# Altium PCB DIOT_Template.PcbDoc (part 1 of 4)
Units mm, origin at the board's own origin, x right, y up, seen from the top; angles counter-clockwise.
Board outline 222.9 x 100 mm, 4 copper layers (L1, P2, P3, L4), stack 1.546 mm thick; 233 components, 184 nets, 1067 pads, 325 vias.
Unrouted connection lines stored in the file: 423.
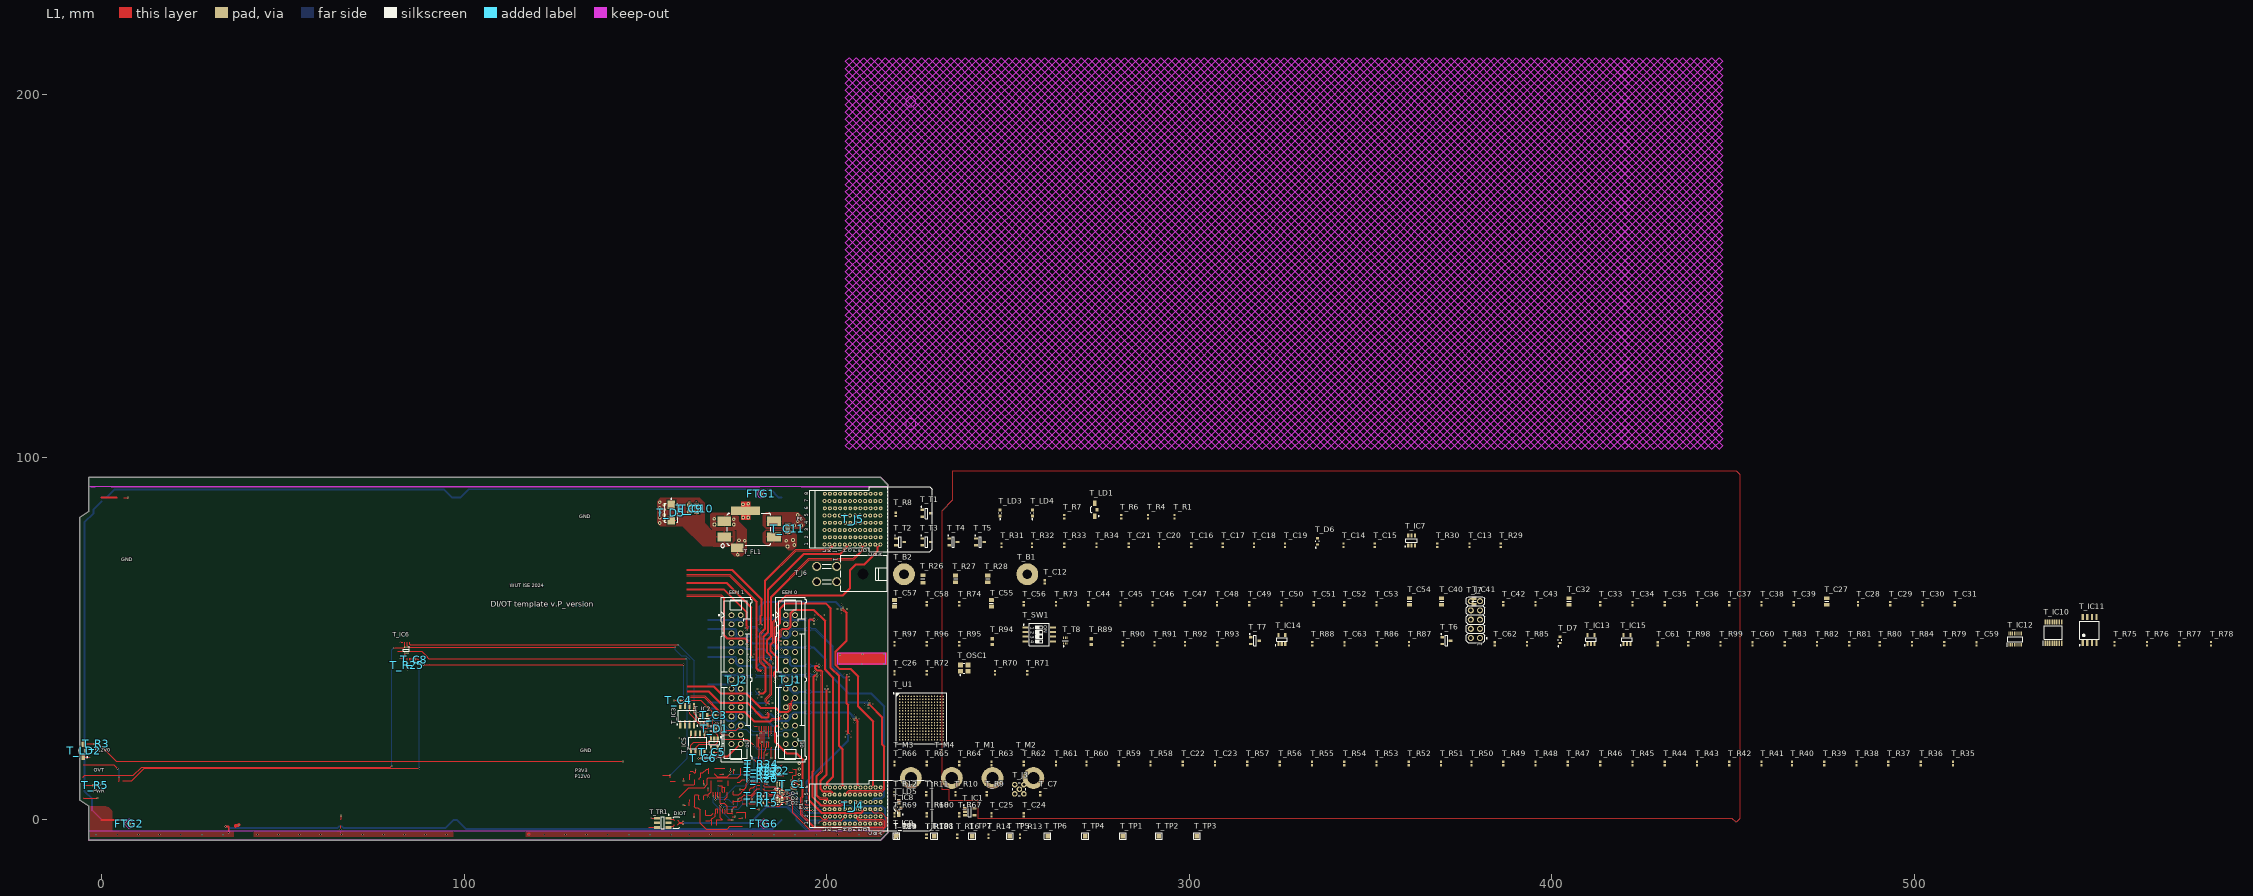
[diagram p0: L1 view]
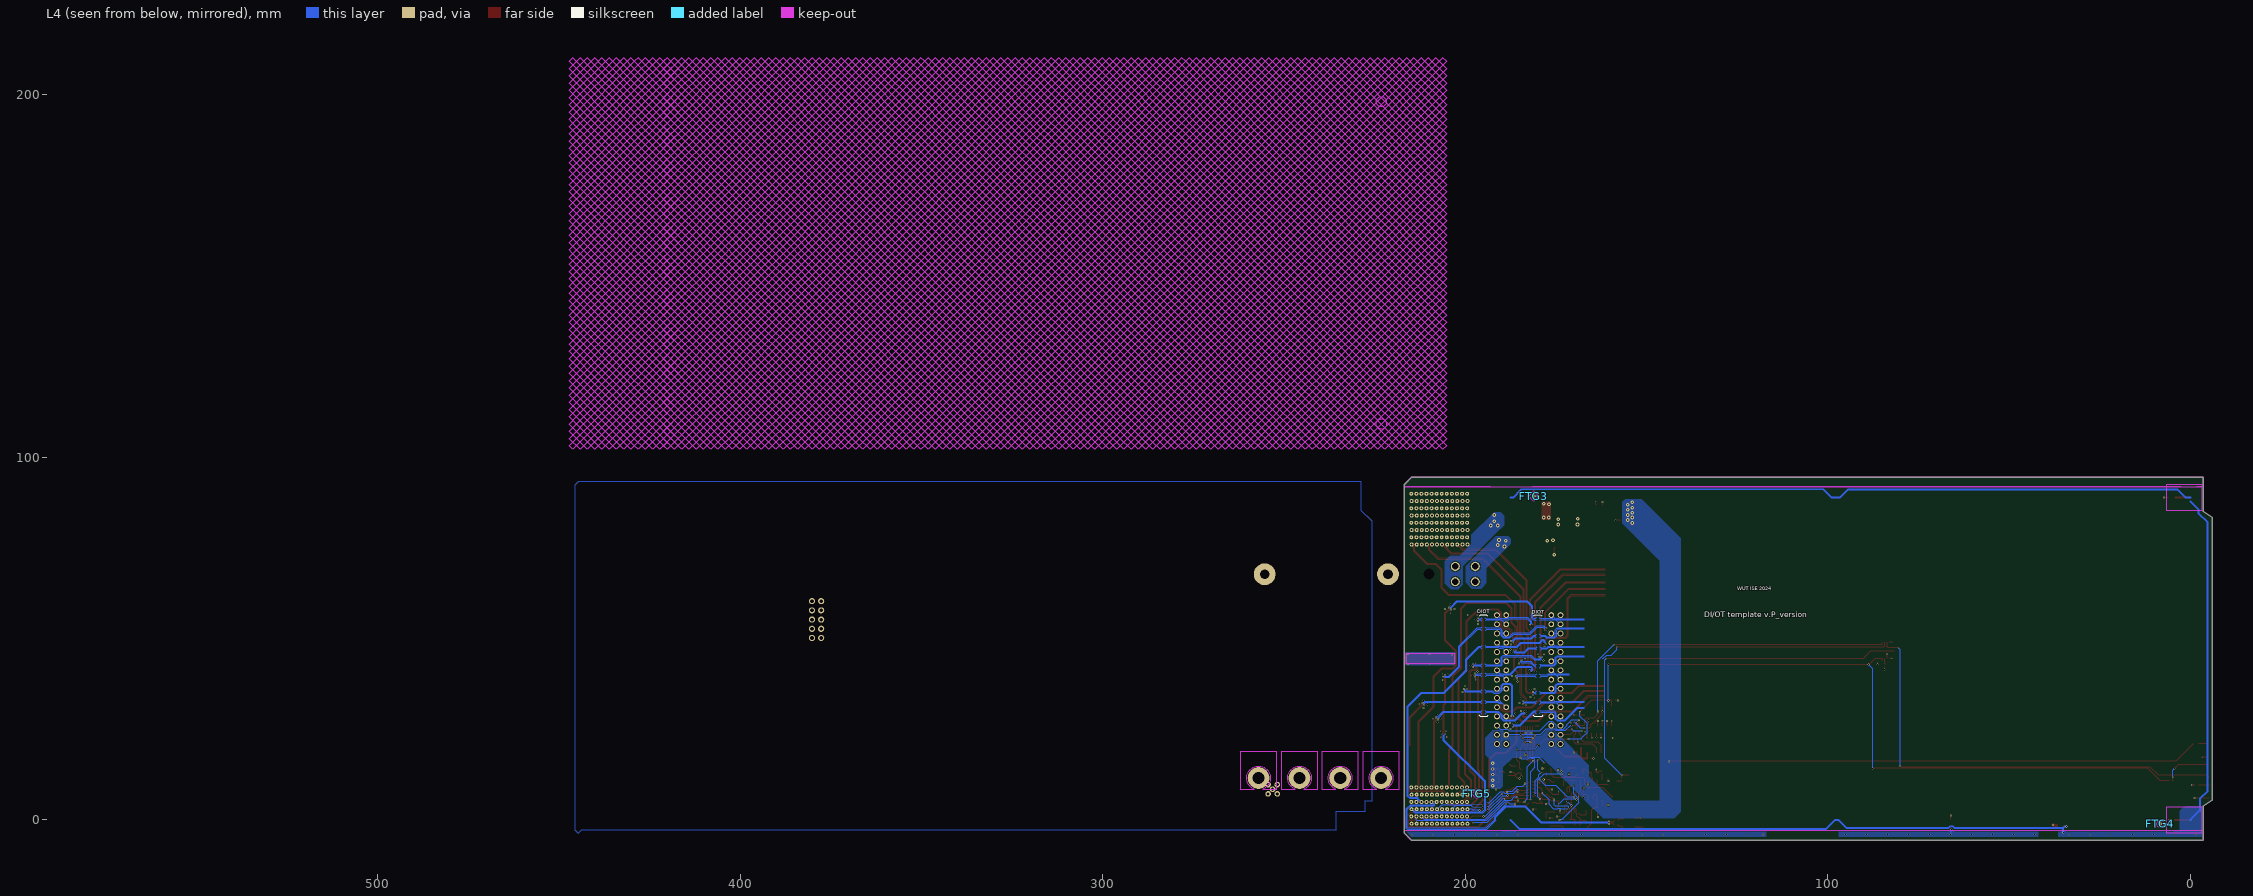
[diagram p1: L4 view, seen from below]
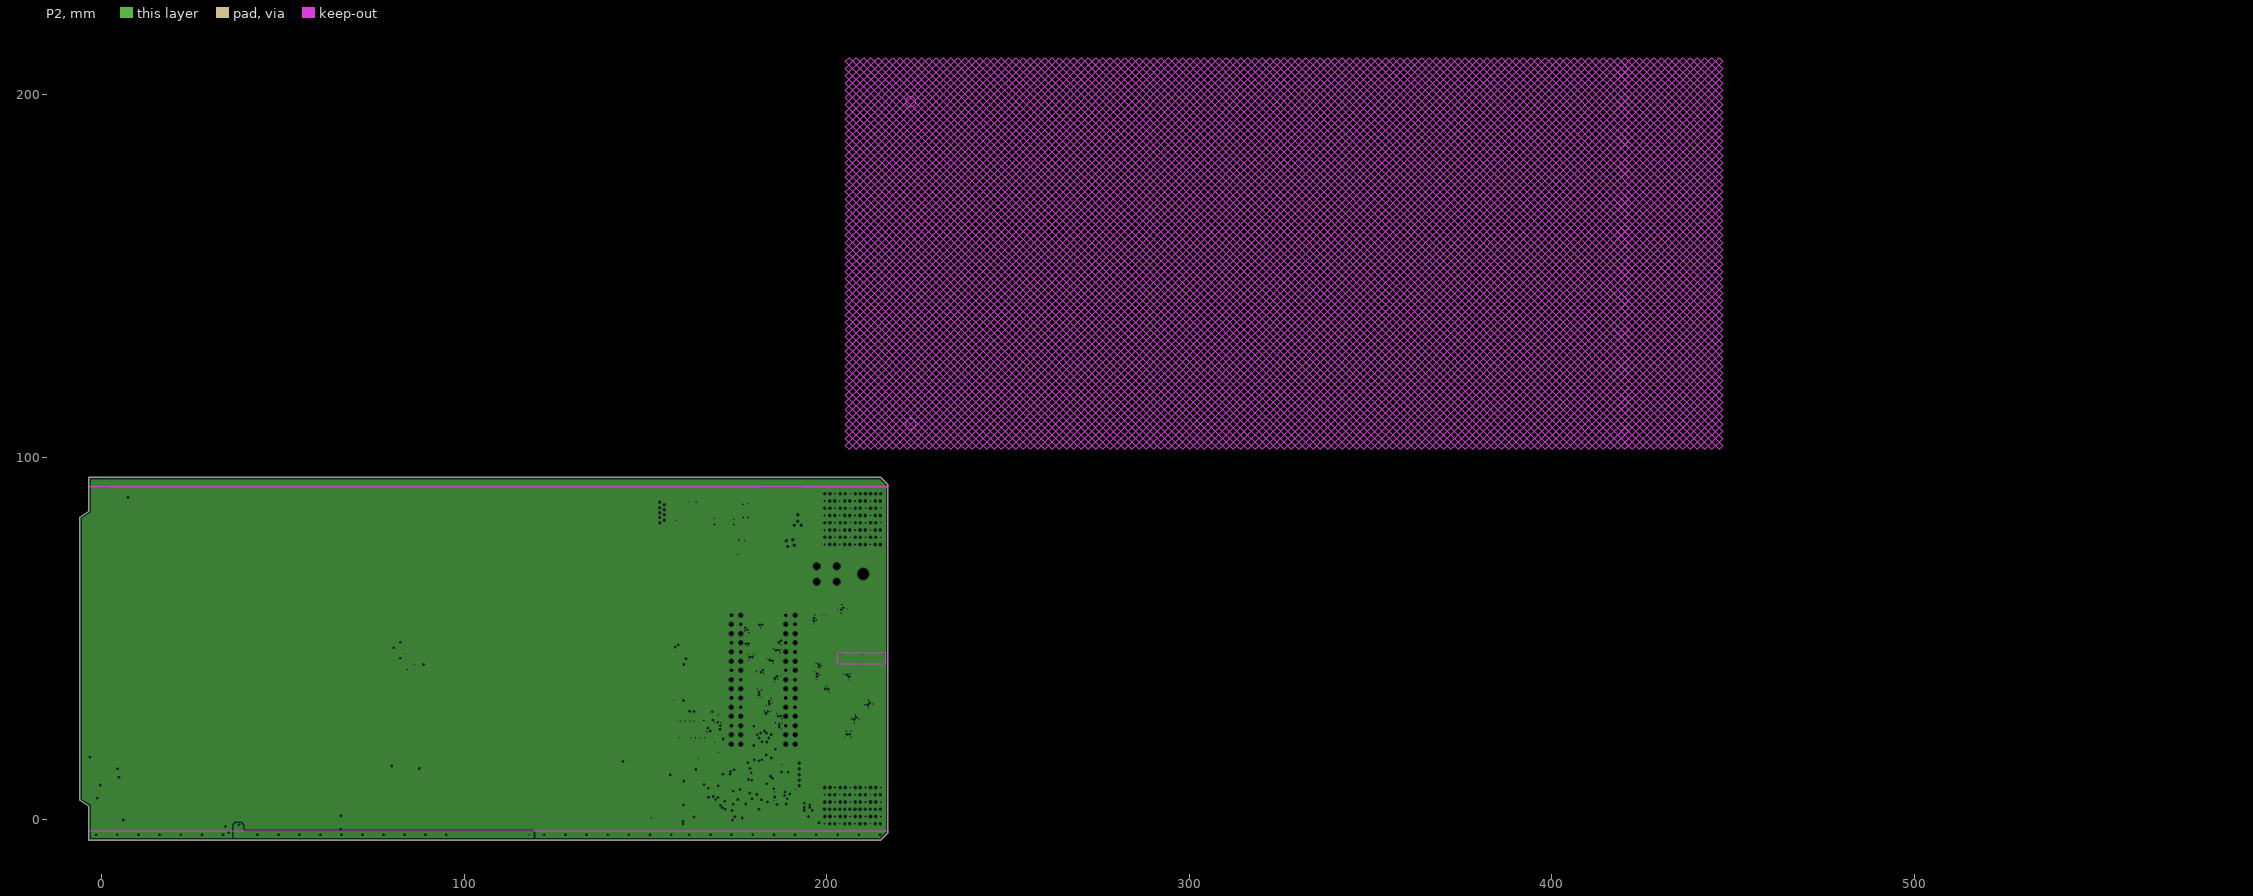
[diagram p2: P2, clearances drawn from the general rule]
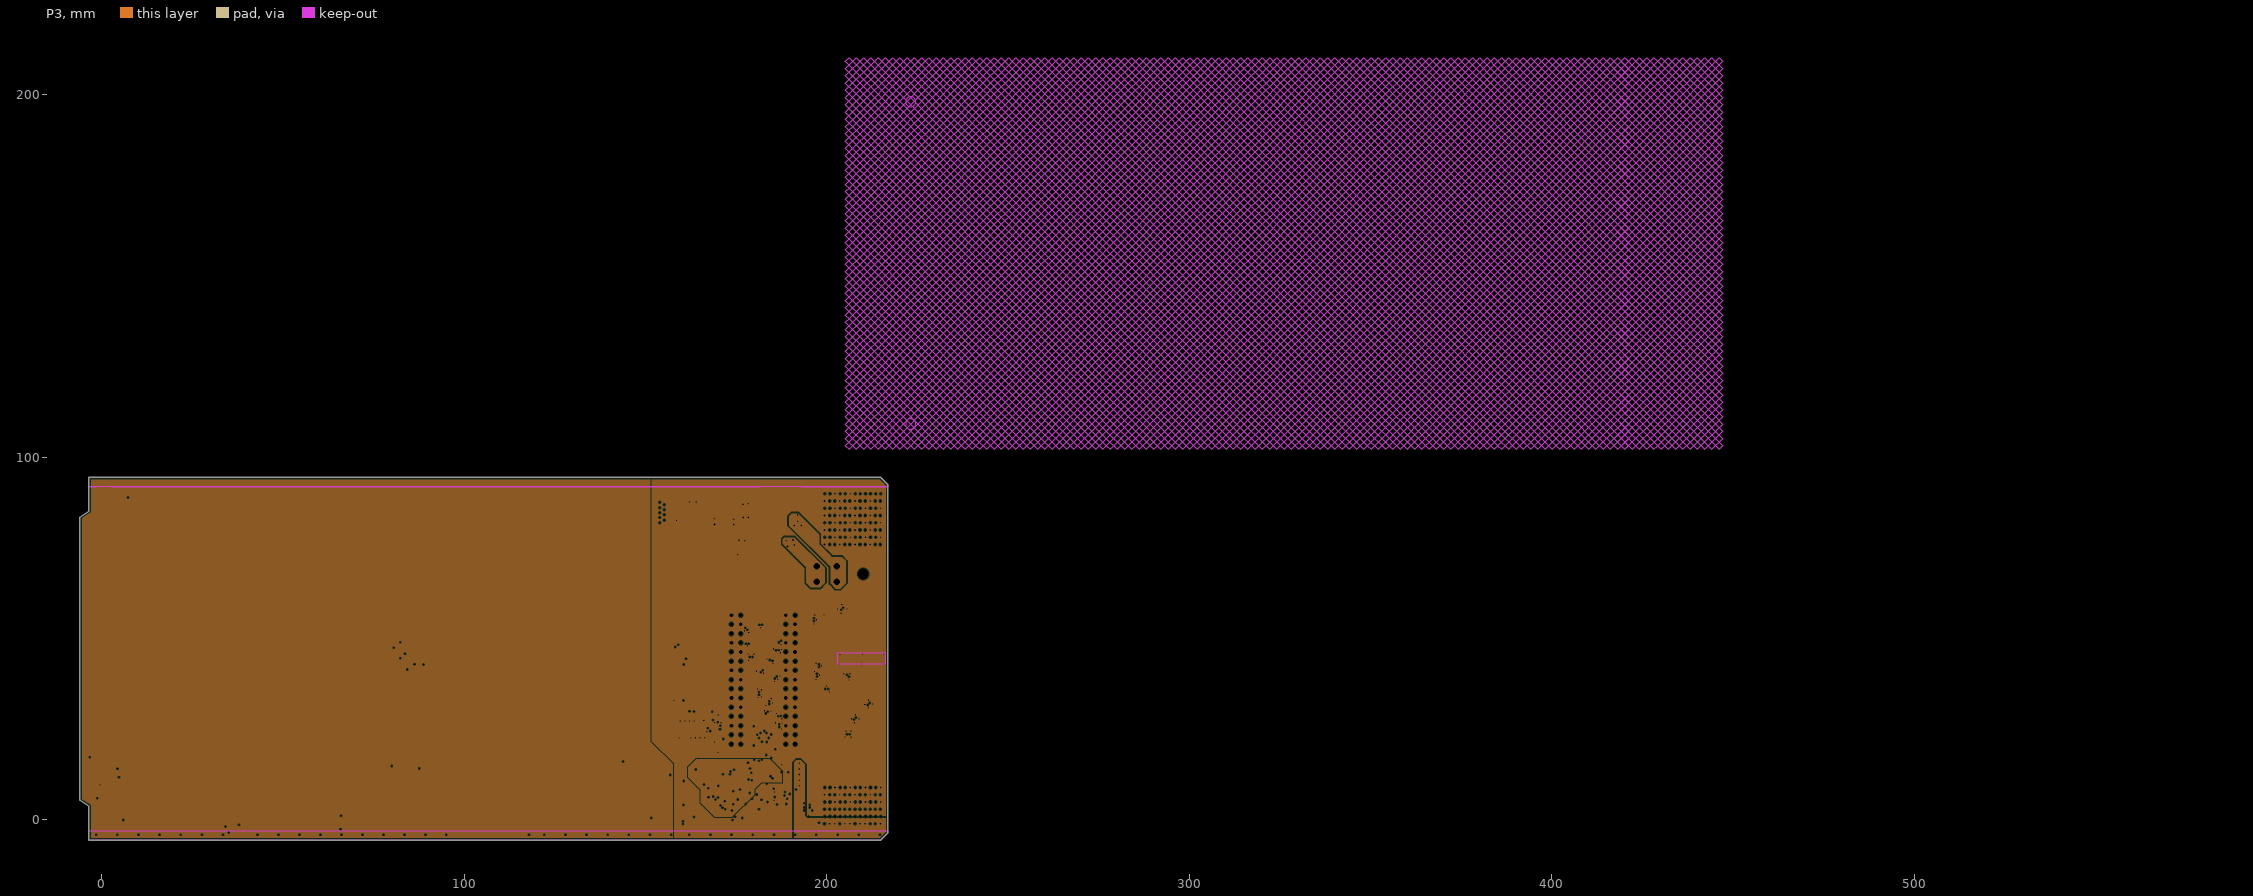
[diagram p3: P3, clearances drawn from the general rule]

## Layer stack, top to bottom
TopSolder: solder mask 0.025, Solder Resist, Dk 3.7
L1: signal copper 0.035
Dielectric1: core 0.12, FR-4, Dk 4.25
P2: plane copper 0.018, net (Multiple Nets)
Dielectric3: core 1.2, FR-4, Dk 4.5
P3: plane copper 0.018, net (Multiple Nets)
Dielectric5: core 0.12, FR-4, Dk 4.25
L4: signal copper 0.035
BottomSolder: solder mask 0.025, Solder Resist, Dk 3.7

## Board outline
-3.5,3.8 -6,5.45 -6,83.45 -3.5,85.1 -3.5,94.45 214.9,94.45 216.9,92.45 216.9,-3.55 214.9,-5.55 -3.5,-5.55

## Design rules (kind name [scope] priority, off if disabled: settings)
AcuteAngle [All] p1: minimum=6.00000000000000E+0001 checktracksonly=FALSE
AssemblyTestPointUsage [All] p1 off:
AssemblyTestpoint [All] p1 off: testpointundercomponent=TRUE minsize=1.016 maxsize=2.54 preferedsize=1.524 minholesize=0 maxholesize=1.016 preferedholesize=0.813 testpointgrid=0.025 usegrid=TRUE gridtolerance=0 allowsidetop=TRUE allowsidebottom=TRUE
BoardOutlineClearance [All] p1: gap=0.4 ignorepadtopadclearanceinfootprint=FALSE
Clearance Clearance_Keepout [IsKeepOut vs IsKeepOut] p1: gap=0 ignorepadtopadclearanceinfootprint=TRUE
Clearance Clearance_1 [IsKeepOut vs IsFree or InComponent('B1') or InComponent('B2') or InComponent('M*')] p2: gap=0 ignorepadtopadclearanceinfootprint=TRUE
Clearance [All] p3: gap=0.127 ignorepadtopadclearanceinfootprint=TRUE except(0: Arc-Hole Track-Hole SMDPad-Hole THPad-Hole Via-Hole Fill-Hole Region-Hole Text-Hole; 0.15: Via-Fill Via-Poly Via-Region Poly-Hole; 0.2: Arc-THPad Track-THPad SMDPad-THPad THPad-THPad THPad-Via; 0.254: Arc-Text Track-Text SMDPad-Text THPad-Text Via-Text Fill-Text Poly-Text Region-Text Text-Text; 0.275: Via-Via)
ComponentClearance ComponentClearance_panel [InComponent('B1') or InComponent('B2') or InComponent('M1') or InComponent('M4') vs Identifier='PcbName-A01.v3.1'] p1: gap=-1 collisioncheckmode=3 verticalgap=-1 showdistances=FALSE
ComponentClearance ComponentClearance_enclosure [InComponent('M*') or InComponent('FTG*') or InComponent('J10') or InComponent('B1') or InComponent('B2') or (Identifier='PcbName-A01.v3.1') vs Identifier='SI-DiotEnclosure-A01.v2'] p2: gap=-1 collisioncheckmode=3 verticalgap=-1 showdistances=TRUE
ComponentClearance ComponentClearance_overlapping [InComponent('M*') vs OnTop and InAnyComponent] p3: gap=0 collisioncheckmode=3 verticalgap=0 showdistances=TRUE donotcheckwithout3dbody=TRUE
ComponentClearance [All] p4: gap=0.2 collisioncheckmode=3 verticalgap=0.2 showdistances=FALSE
DiffPairsRouting [InAnyDifferentialPair] p1: maxlimit=0.16 minlimit=0.16 mostfreqgap=0.16 toplayer_minwidth=0.14 toplayer_maxwidth=0.14 toplayer_prefwidth=0.127 bottomlayer_minwidth=0.14 bottomlayer_maxwidth=0.14 bottomlayer_prefwidth=0.127 impedanceprofiledriven=TRUE impedanceprofileid={A56CCF9F-E5F6-44CF-B4D8-1B3BD42FE987} impedanceprofilevalue=100.000000 maxuncoupledlength=12.7
FabricationTestPointUsage TestPointUsage [All] p1: valid=0 allowmultiple=FALSE
FabricationTestpoint Testpoint [All] p1: side=3 testpointundercomponent=TRUE minsize=1.016 maxsize=2.54 preferedsize=1.524 minholesize=0.508 maxholesize=1.016 preferedholesize=0.813 testpointgrid=0.025 allowsidetop=TRUE allowsidebottom=TRUE usegrid=TRUE gridtolerance=0
Height Height_1 [OnLayer('BottomLayer')] p1: minheight=0 maxheight=1.6 prefheight=1
Height [All] p2: minheight=0 maxheight=25.4 prefheight=12.7
HoleSize [All] p1: absolutevalues=TRUE maxlimit=3.4 minlimit=0.15 maxpercent=80.000 minpercent=20.000
HoleToHoleClearance [All] p1: gap=0.15 allowstackedmicrovias=TRUE
MatchedLengths MatchedLengths_LVTTL [InNetClass('LVTTL[4..15]')] p1: tolerance=25.4 checknetsindiffpair=FALSE checkdiffpairvsdiffpair=TRUE checkxsignals=TRUE checkothers=TRUE usedelayunits=TRUE delaytolerance=100.000000
MatchedLengths MatchedLengths_LVDS_InPair [InxSignalClass('LVDS')] p2: tolerance=25.4 checknetsindiffpair=TRUE checkdiffpairvsdiffpair=FALSE checkxsignals=FALSE checkothers=FALSE usedelayunits=TRUE delaytolerance=5.000000
MatchedLengths MatchedLengths_LVDS_All [InxSignalClass('xLVDS')] p3: tolerance=25.4 checknetsindiffpair=FALSE checkdiffpairvsdiffpair=TRUE checkxsignals=TRUE checkothers=TRUE usedelayunits=TRUE delaytolerance=25.000000
MatchedLengths MatchedLengths_BP_InPair [InxSignalClass('BP')] p4: tolerance=5 checknetsindiffpair=TRUE checkdiffpairvsdiffpair=FALSE checkxsignals=FALSE checkothers=FALSE usedelayunits=TRUE delaytolerance=5.000000
MatchedLengths MatchedLengths_BP_All [InxSignalClass('BP')] p5: tolerance=25.4 checknetsindiffpair=FALSE checkdiffpairvsdiffpair=TRUE checkxsignals=TRUE checkothers=TRUE usedelayunits=TRUE delaytolerance=25.000000
MinimumSolderMaskSliver [All] p1: minsoldermaskwidth=0.05
ParallelSegment [All] p1 off: limit=5 gap=0.254
PlaneClearance PlaneClearance_Diff [InAnyDifferentialPair] p1: clearance=0.2
PlaneClearance [All] p2: clearance=0.254
PlaneConnect PlaneConnect_1 [HasCompParameterValue('PressFit', 'Yes')] p1: planeconnectstyle=Direct reliefexpansion=0.2 reliefentries=4 reliefconductorwidth=0.254 reliefairgap=0.254
PlaneConnect [All] p2: pad.planeconnectstyle=Relief pad.reliefexpansion=0.2 pad.reliefentries=4 pad.reliefconductorwidth=0.254 pad.reliefairgap=0.254 via.planeconnectstyle=Direct via.reliefexpansion=0.2 via.reliefentries=4 via.reliefconductorwidth=0.254 via.reliefairgap=0.15
PolygonConnect PolygonConnect_1 [InPolygonClass('Direct')] p1: connectstyle=Direct reliefconductorwidth=0.254 reliefentries=2 polygonreliefangle="45 Angle" airgapwidth=0.254
PolygonConnect PolygonConnect_2 [InNetClass('PWR')] p2: thpad.connectstyle=Relief thpad.reliefconductorwidth=0.5 thpad.reliefentries=4 thpad.polygonreliefangle="90 Angle" thpad.airgapwidth=0.254 smdpad.connectstyle=Relief smdpad.reliefconductorwidth=0.5 smdpad.reliefentries=4 smdpad.polygonreliefangle="90 Angle" smdpad.airgapwidth=0.25 via.connectstyle=Direct via.reliefconductorwidth=0.254 via.reliefentries=2 via.polygonreliefangle="90 Angle" via.airgapwidth=0.254
PolygonConnect [All] p3: thpad.connectstyle=Relief thpad.reliefconductorwidth=0.254 thpad.reliefentries=4 thpad.polygonreliefangle="90 Angle" thpad.airgapwidth=0.254 smdpad.connectstyle=Relief smdpad.reliefconductorwidth=0.254 smdpad.reliefentries=4 smdpad.polygonreliefangle="90 Angle" smdpad.airgapwidth=0.254 via.connectstyle=Direct via.reliefconductorwidth=0.254 via.reliefentries=4 via.polygonreliefangle="90 Angle" via.airgapwidth=0.254
ReturnPath [All] p1: impedanceprofileid={766963E9-4C46-4FD0-92C7-72FE31CC1419} _gaplimit=0 _useantipads=TRUE
RoomDefinition Overlapping [InComponentClass('Overlapping')] p1: confinementstyle=ConfineIn formatcopy=TRUE lockcomponents=FALSE outline 194.742,-3.302 229.921,-3.302 229.921,11.684 194.742,11.684
RoomDefinition U_PWR_Supply [InComponentClass('U_PWR_Supply')] p2: confinementstyle=ConfineIn formatcopy=TRUE lockcomponents=FALSE outline 101.549,-6.782 147.473,-6.782 147.473,18.136 101.549,18.136
RoutingLayers RoutingLayers_1 [InAnyDifferentialPair] p1 off: top layer_v5=TRUE bottom layer_v5=TRUE
RoutingLayers RoutingLayers_2 [InNetClass('50Ohm')] p2: top layer_v5=TRUE bottom layer_v5=TRUE
RoutingLayers [All] p3: top layer_v5=TRUE bottom layer_v5=TRUE
RoutingTopology RoutingTopology_DDRAddressAndControls [InNetClass('DDR_AddressAndControls')] p1: topology=Daisy_Simple
RoutingTopology RoutingTopology_DDRAddressAndControls_1 [InNetClass('DDR_AddressAndControls_1')] p2: topology=Daisy_Simple
RoutingTopology [All] p3: topology=Shortest
RoutingVias [All] p1: holewidth=0.25 width=0.5 viastyle="Through Hole" minholewidth=0.25 minwidth=0.5 maxholewidth=0.45 maxwidth=1 viatemplateguid#1={8CC95450-9C4C-4A66-BFBB-022CCA0C80F0} viatemplateguid#2={7BA2FAF8-F5E9-4BF3-9BD8-21DB5C2C29C0} viatemplatename#1=v50h20 viatemplatename#2=v80h50
SMDEntry [All] p1 off: side=TRUE corner=TRUE anyangle=FALSE
SilkToSilkClearance [All] p1: silktosilkclearance=0.1
SilkToSolderMaskClearance SilkscreenOverComponentPads [IsPad] p1: minsilkscreentomaskgap=0.125 clearancetoexposedcopper=FALSE
SolderMaskExpansion SolderMaskExpansion_1 [IsVia] p1: expansion=0.05 istentingtop=TRUE
SolderMaskExpansion [All] p2: expansion=0.05 istentingtop=FALSE
StubLength [All] p1: limit=3
SupplyNets "Schematic Supply Nets_13" [InNet('VCCIO_1')] p1: voltage=0.000
SupplyNets "Schematic Supply Nets_12" [InNet('P1V2')] p2: voltage=0.000
SupplyNets "Schematic Supply Nets_11" [InNet('CHASSIS')] p3: voltage=0.000
SupplyNets "Schematic Supply Nets_10" [InNet('P3V3_PROG')] p4: voltage=0.000
SupplyNets "Schematic Supply Nets_9" [InNet('P2V5')] p5: voltage=0.000
SupplyNets "Schematic Supply Nets_8" [InNet('VCCIO_0')] p6: voltage=0.000
SupplyNets "Schematic Supply Nets_4" [InNet('VCCIO_3')] p7: voltage=0.000
SupplyNets "Schematic Supply Nets_7" [InNet('GND')] p8: voltage=0.000
SupplyNets "Schematic Supply Nets_6" [InNet('P3V3_MP2')] p9: voltage=0.000
SupplyNets "Schematic Supply Nets_3" [InNet('P3V3_MP')] p10: voltage=0.000
SupplyNets "Schematic Supply Nets_1" [InNet('P12V0')] p11: voltage=0.000
SupplyNets "Schematic Supply Nets" [InNet('P3V3')] p12: voltage=0.000
UnConnectedPin [All] p1 off:
UnRoutedNet UnRoutedNet_1 [Not (InNet('STRIP1') or InNet('FMC_VIO_B_M2C'))] p1: checkbadconnections=TRUE
UnpouredPolygon UnpouredPolygon_1 [InPolygonClass('Copper_Balancing')] p1: allowunpoured=TRUE
UnpouredPolygon [All] p2:
ViasUnderSMD ViasUnderSMD_1 [InPadClass('ViaInPad')     or InComponent('IC21')] p1: allowed=TRUE
ViasUnderSMD [All] p2: allowed=FALSE
Width Width_pwr [InNetClass('PWR')] p1: maxlimit=2 minlimit=0.3 preferedwidth=0.3 minimp=50.000000 maximp=50.000000 favimp=50.000000
Width Width_50Ohm [InNetClass('SE50')] p2: maxlimit=0.23 minlimit=0.23 preferedwidth=0.19 impedanceprofiledriven=TRUE impedanceprofileid={817017FA-2CA9-4D33-80A1-67892E8A955B} impedanceprofilevalue=50.000000 minimp=50.000000 maximp=50.000000 favimp=50.000000
Width [All] p3: maxlimit=2 minlimit=0.125 preferedwidth=0.125 minimp=50.000000 maximp=50.000000 favimp=50.000000
12 further rules are at their usual default settings.

## Classes and differential pairs
component class LEDs: T_LD1 T_LD2 T_LD3 T_LD4 T_LD5 T_R1 T_R3 T_R5 T_R6 T_R100 T_T1 T_TP1 T_TP2 T_TP3 T_TP4 T_TP5 T_TP6 T_TP7 T_TP8 T_TP9
differential pair class MGT: BP_MGT.Rx BP_MGT.Tx
net class SHARED_BUS[0..4]: SHARED_BUS0 SHARED_BUS1 SHARED_BUS2 SHARED_BUS3 SHARED_BUS4
net class 50Ohm: EEM_CLK_SE NetT_C7_2
component class U_Power-up_delay: T_C13 T_C14 T_C15 T_C16 T_C17 T_C18 T_C19 T_C20 T_C21 T_D6 T_IC7 T_R29 T_R30 T_R31 T_R32 T_R33 T_R34 T_T2 T_T3 T_T4 T_T5
component class U_FPGA_Supply: T_C27 T_C28 T_C29 T_C30 T_C31 T_C32 T_C33 T_C34 T_C35 T_C36 T_C37 T_C38 T_C39 T_C40 T_C41 T_C42 T_C43 T_C44 T_C45 T_C46 T_C47 T_C48 T_C49 T_C50 T_C51 T_C52 T_C53 T_C54 T_C55 T_C56 T_C57 T_C58 T_R73 T_R74
component class U_FPGA_Config: T_C59 T_C60 T_C61 T_C62 T_C63 T_C64 T_D7 T_IC10 T_IC11 T_IC12 T_IC13 T_IC14 T_IC15 T_J7 T_R70 T_R71 T_R75 T_R76 T_R77 T_R78 T_R79 T_R80 T_R81 T_R82 T_R83 T_R84 T_R85 T_R86 T_R87 T_R88 T_R89 T_R90 T_R91 T_R92 T_R93 T_R94 T_R95 T_R96 T_R97 T_R98 T_R99 T_R101 T_SW1 T_T6 T_T7 T_T8
component class U_FPGA_Bank2-3: T_C26 T_OSC1 T_R72
component class U_FPGA_Bank0-1: T_U1
component class U_DIOT_signal_routing: T_C22 T_C23 T_IC8 T_R35 T_R36 T_R37 T_R38 T_R39 T_R40 T_R41 T_R42 T_R43 T_R44 T_R45 T_R46 T_R47 T_R48 T_R49 T_R50 T_R51 T_R52 T_R53 T_R54 T_R55 T_R56 T_R57 T_R58 T_R59 T_R60 T_R61 T_R62 T_R63 T_R64 T_R65 T_R66
component class "I2C switch": T_C24 T_C25 T_IC9 T_R67 T_R68 T_R69
component class U_Temp_monitoring: T_C8 T_IC6 T_R25
component class "Power input connector": T_C9 T_C10 T_C11 T_D5 T_FL1 T_J6
component class Overlapping: T_J4
component class U_CLK_GEN: T_C7 T_J3 T_R9 T_R10 T_R11 T_R12 T_TR1
component class EEM_Connectors: IC42 IC43 T_C3 T_C4 T_C5 T_C6 T_D1 T_IC2 T_IC3 T_IC4 T_IC5 T_J1 T_J2
net class ESD_STRIP: CHASSIS STRIP2 STRIP3
net class PWR: NetT_C2_2 NetT_C11_2 P3V3 P3V3_MP P12V0
differential pair class Diff_100Ohm: BP_CLK.CLK CK_MMCX CK_MMCX_ALT CK_MMCX_IN CK_OSC CK_OSC_ALT CK_SMA CK_SMA_ALT CK_SMA_IN DDR3_CK DDR3_LDQS DDR3_UDQS EEM_IO.LVDS0 EEM_IO.LVDS1 EEM_IO.LVDS2 EEM_IO.LVDS3 EEM_IO.LVDS4 EEM_IO.LVDS5 EEM_IO.LVDS6 EEM_IO.LVDS7 EEM_IO.LVDS8 EEM_IO.LVDS9 EEM_IO.LVDS10 EEM_IO.LVDS11 EEM_IO.LVDS12 EEM_IO.LVDS13 EEM_IO.LVDS14 EEM_IO.LVDS15 FMC.HA0 FMC.HA1 FMC.HA2 FMC.HA3 FMC.HA4 FMC.HA5 FMC.HA6 FMC.HA7 FMC.HA8 FMC.HA9 FMC.HA10 FMC.HA11 FMC.HA12 FMC.HA13 FMC.HA14 FMC.HA15 FMC.HA16 FMC.HA17 FMC.HA18 FMC.HA19 FMC.HA20 FMC.HA21 FMC.HA22 FMC.HA23 FMC.HB0 FMC.HB1 FMC.HB2 FMC.HB3 FMC.HB4 FMC.HB5 FMC.HB6 FMC.HB7 FMC.HB8 FMC.HB9 FMC.HB10 FMC.HB11 FMC.HB12 FMC.HB13 FMC.HB14 FMC.HB15 FMC.HB16 FMC.HB17 FMC.HB18 FMC.HB19 FMC.HB20 FMC.HB21 FMC.LA0 FMC.LA1 FMC.LA2 FMC.LA3 FMC.LA4 FMC.LA5 FMC.LA6 FMC.LA7 FMC.LA8 FMC.LA9 FMC.LA10 FMC.LA11 FMC.LA12 FMC.LA13 FMC.LA14 FMC.LA15 FMC.LA16 FMC.LA17 FMC.LA18 FMC.LA19 FMC.LA20 FMC.LA21 FMC.LA22 FMC.LA23 FMC.LA24 FMC.LA25 FMC.LA26 FMC.LA27 FMC.LA28 FMC.LA29 FMC.LA30 FMC.LA31 FMC.LA32 FMC.LA33 FMC_CLK.CLK_BIDIR2 FMC_CLK.CLK_BIDIR3 FMC_CLK.CLK_M2C0 FMC_CLK.CLK_M2C1 FMC_MGT.GBTCLK_M2C0 FMC_MGT.GBTCLK_M2C1 GBTCLK0_M2C LVDS_DUAL0 LVDS_DUAL1 LVDS_DUAL2 LVDS_DUAL3 LVDS_DUAL4 LVDS_JTAG_TCK LVDS_JTAG_TDI LVDS_JTAG_TDO LVDS_JTAG_TMS LVDS_JTAG_TRSTn MGT_OR_LVDS OSC PE_CK PE_CLK PE_CLK.CLK PE_CLK_ALT
net class GA[0..3]: GA0 GA1 GA2 GA3
net class EEM_IO.LVDS_P[0..15]: EEM_IO.LVDS_P0 EEM_IO.LVDS_P1 EEM_IO.LVDS_P2 EEM_IO.LVDS_P3 EEM_IO.LVDS_P4 EEM_IO.LVDS_P5 EEM_IO.LVDS_P6 EEM_IO.LVDS_P7 EEM_IO.LVDS_P8 EEM_IO.LVDS_P9 EEM_IO.LVDS_P10 EEM_IO.LVDS_P11 EEM_IO.LVDS_P12 EEM_IO.LVDS_P13 EEM_IO.LVDS_P14 EEM_IO.LVDS_P15
net class EEM_IO.LVDS_N[0..15]: EEM_IO.LVDS_N0 EEM_IO.LVDS_N1 EEM_IO.LVDS_N2 EEM_IO.LVDS_N3 EEM_IO.LVDS_N4 EEM_IO.LVDS_N5 EEM_IO.LVDS_N6 EEM_IO.LVDS_N7 EEM_IO.LVDS_N8 EEM_IO.LVDS_N9 EEM_IO.LVDS_N10 EEM_IO.LVDS_N11 EEM_IO.LVDS_N12 EEM_IO.LVDS_N13 EEM_IO.LVDS_N14 EEM_IO.LVDS_N15
net class BP_IO.LVDS_P[0..15]: BP_IO.LVDS_P0 BP_IO.LVDS_P1 BP_IO.LVDS_P2 BP_IO.LVDS_P3 BP_IO.LVDS_P4 BP_IO.LVDS_P5 BP_IO.LVDS_P6 BP_IO.LVDS_P7 BP_IO.LVDS_P8 BP_IO.LVDS_P9 BP_IO.LVDS_P10 BP_IO.LVDS_P11 BP_IO.LVDS_P12 BP_IO.LVDS_P13 BP_IO.LVDS_P14 BP_IO.LVDS_P15
net class BP_IO.LVDS_N[0..15]: BP_IO.LVDS_N0 BP_IO.LVDS_N1 BP_IO.LVDS_N2 BP_IO.LVDS_N3 BP_IO.LVDS_N4 BP_IO.LVDS_N5 BP_IO.LVDS_N6 BP_IO.LVDS_N7 BP_IO.LVDS_N8 BP_IO.LVDS_N9 BP_IO.LVDS_N10 BP_IO.LVDS_N11 BP_IO.LVDS_N12 BP_IO.LVDS_N13 BP_IO.LVDS_N14 BP_IO.LVDS_N15
component class CPCIS_Connectors_P1_P6: T_D2 T_D3 T_D4 T_J4 T_J5 T_R13 T_R14 T_R15 T_R16 T_R17 T_R18 T_R19 T_R20 T_R21 T_R22 T_R23 T_R24
component class U_Mechanical: FTG1 FTG2 FTG3 FTG4 FTG5 FTG6 T_B1 T_B2 T_C12 T_M1 T_M2 T_M3 T_M4 T_R26 T_R27 T_R28
component class U_PWR_Supply: T_C1 T_C2 T_IC1 T_R2 T_R4 T_R7 T_R8
differential pair EEM_CLK: +EEM_CLK_P -EEM_CLK_N
differential pair BP_MGT.Tx: +BP_MGT.Tx_P -BP_MGT.Tx_N
differential pair BP_MGT.Rx: +BP_MGT.Rx_P -BP_MGT.Rx_N
differential pair BP_CLK.CLK: +BP_CLK.CLK_P -BP_CLK.CLK_N
differential pair PE_CLK: +PE_CLK_P -PE_CLK_N
differential pair EEM_IO.LVDS15: +EEM_IO.LVDS_P15 -EEM_IO.LVDS_N15
differential pair EEM_IO.LVDS4: +EEM_IO.LVDS_P4 -EEM_IO.LVDS_N4
differential pair EEM_IO.LVDS3: +EEM_IO.LVDS_P3 -EEM_IO.LVDS_N3
differential pair EEM_IO.LVDS2: +EEM_IO.LVDS_P2 -EEM_IO.LVDS_N2
differential pair EEM_IO.LVDS1: +EEM_IO.LVDS_P1 -EEM_IO.LVDS_N1
differential pair EEM_IO.LVDS0: +EEM_IO.LVDS_P0 -EEM_IO.LVDS_N0
differential pair EEM_IO.LVDS14: +EEM_IO.LVDS_P14 -EEM_IO.LVDS_N14
differential pair EEM_IO.LVDS13: +EEM_IO.LVDS_P13 -EEM_IO.LVDS_N13
differential pair EEM_IO.LVDS12: +EEM_IO.LVDS_P12 -EEM_IO.LVDS_N12
differential pair EEM_IO.LVDS11: +EEM_IO.LVDS_P11 -EEM_IO.LVDS_N11
differential pair EEM_IO.LVDS10: +EEM_IO.LVDS_P10 -EEM_IO.LVDS_N10
differential pair EEM_IO.LVDS9: +EEM_IO.LVDS_P9 -EEM_IO.LVDS_N9
differential pair EEM_IO.LVDS8: +EEM_IO.LVDS_P8 -EEM_IO.LVDS_N8
differential pair EEM_IO.LVDS7: +EEM_IO.LVDS_P7 -EEM_IO.LVDS_N7
differential pair EEM_IO.LVDS6: +EEM_IO.LVDS_P6 -EEM_IO.LVDS_N6
differential pair EEM_IO.LVDS5: +EEM_IO.LVDS_P5 -EEM_IO.LVDS_N5
differential pair BP_IO.LVDS15: +BP_IO.LVDS_P15 -BP_IO.LVDS_N15
differential pair BP_IO.LVDS14: +BP_IO.LVDS_P14 -BP_IO.LVDS_N14
differential pair BP_IO.LVDS13: +BP_IO.LVDS_P13 -BP_IO.LVDS_N13
differential pair BP_IO.LVDS12: +BP_IO.LVDS_P12 -BP_IO.LVDS_N12
differential pair BP_IO.LVDS11: +BP_IO.LVDS_P11 -BP_IO.LVDS_N11
differential pair BP_IO.LVDS10: +BP_IO.LVDS_P10 -BP_IO.LVDS_N10
differential pair BP_IO.LVDS9: +BP_IO.LVDS_P9 -BP_IO.LVDS_N9
differential pair BP_IO.LVDS8: +BP_IO.LVDS_P8 -BP_IO.LVDS_N8
differential pair BP_IO.LVDS7: +BP_IO.LVDS_P7 -BP_IO.LVDS_N7
differential pair BP_IO.LVDS6: +BP_IO.LVDS_P6 -BP_IO.LVDS_N6
differential pair BP_IO.LVDS5: +BP_IO.LVDS_P5 -BP_IO.LVDS_N5
differential pair BP_IO.LVDS4: +BP_IO.LVDS_P4 -BP_IO.LVDS_N4
differential pair BP_IO.LVDS3: +BP_IO.LVDS_P3 -BP_IO.LVDS_N3
differential pair BP_IO.LVDS2: +BP_IO.LVDS_P2 -BP_IO.LVDS_N2
differential pair BP_IO.LVDS1: +BP_IO.LVDS_P1 -BP_IO.LVDS_N1
differential pair BP_IO.LVDS0: +BP_IO.LVDS_P0 -BP_IO.LVDS_N0

## Components (designator, comment, footprint, x,y, rotation, side; value= is the part's Value field where it differs from the comment)
FTG1 "Use only in PCB" FIDUCIAL_TOP_C100-200#1 181.9,89.9 r90 top
FTG2 "Use only in PCB" FIDUCIAL_TOP_S100-200 7.6,-1.1 r90 top
FTG3 "Use only in PCB" FIDUCIAL_TOP_S100-200 181.1,89.3 r90 bottom
FTG4 "Use only in PCB" FIDUCIAL_TOP_C100-200#2 8.3,-1.1 r90 bottom
FTG5 "Use only in PCB" FIDUCIAL_TOP_S100-200 196.8,7.2 r90 bottom
FTG6 "Use only in PCB" FIDUCIAL_TOP_S100-200 182.6,-1.1 r90 top
T_B1 "Plated Hole" c600h270 255.329,67.75 r0 top
T_B2 "Plated Hole" c600h270 221.329,67.75 r0 top
T_C1 "4.7uF" CAPC2012X135N 190.655,9.765 r90 top
T_C2 "4.7uF" CAPC2012X135N 186.1,13.5 r90 top
T_C3 "100nF" CAPC1005X55N 168.8,28.9 r180 top
T_C4 "100nF" CAPC1005X55N 159.163,32.937 r0 top
T_C5 "100nF" CAPC1005X55N 168.5,18.6 r180 top
T_C6 "100nF" CAPC1005X55N 165.9,16.968 r0 top
T_C7 "100nF" CAPC1005X55N 258.929,7.25 r90 top
T_C8 "100nF" CAPC1005X55N 86.3,44.1 r90 top
T_C9 "10uF" CAPC2012X95N 162.171,85.851 r270 top
T_C10 "10uF" CAPC2012X95N 164.121,85.851 r270 top
T_C11 "10uF" CAPC2012X95N 189.281,80.312 r270 top
T_C12 "22pF" CAPC1005X55N 260.129,65.65 r90 top
T_C13 "10nF" CAPC1005X55N 377.329,75.75 r90 top
T_C14 "100nF" CAPC1005X55N 342.529,75.75 r90 top
T_C15 "100nF" CAPC1005X55N 351.129,75.75 r90 top
T_C16 "10nF" CAPC1005X55N 300.529,75.75 r90 top
T_C17 "10nF" CAPC1005X55N 309.229,75.75 r90 top
T_C18 "10nF" CAPC1005X55N 317.829,75.75 r90 top
T_C19 "10nF" CAPC1005X55N 326.429,75.75 r90 top
T_C20 "100nF" CAPC1005X55N 291.629,75.75 r90 top
T_C21 "100nF" CAPC1005X55N 283.329,75.75 r90 top
T_C22 "100nF" CAPC1005X55N 298.229,15.55 r90 top
T_C23 "100nF" CAPC1005X55N 307.129,15.55 r90 top
T_C24 "100nF" CAPC1005X55N 254.329,1.35 r90 top
T_C25 "100nF" CAPC1005X55N 245.429,1.35 r90 top
T_C26 "100nF" CAPC1005X55N 218.729,40.55 r90 top
T_C27 "4.7uF" CAPC2012X135N 475.829,60.25 r90 top
T_C28 "100nF" CAPC1005X55N 484.429,59.65 r90 top
T_C29 "100nF" CAPC1005X55N 493.329,59.65 r90 top
T_C30 "100nF" CAPC1005X55N 502.229,59.65 r90 top
T_C31 "100nF" CAPC1005X55N 511.129,59.65 r90 top
T_C32 "4.7uF" CAPC2012X135N 404.729,60.25 r90 top
T_C33 "100nF" CAPC1005X55N 413.329,59.65 r90 top
T_C34 "100nF" CAPC1005X55N 422.229,59.65 r90 top
T_C35 "100nF" CAPC1005X55N 431.129,59.65 r90 top
T_C36 "100nF" CAPC1005X55N 440.029,59.65 r90 top
T_C37 "100nF" CAPC1005X55N 448.929,59.65 r90 top
T_C38 "100nF" CAPC1005X55N 457.829,59.65 r90 top
T_C39 "100nF" CAPC1005X55N 466.729,59.65 r90 top
T_C40 "4.7uF" CAPC2012X135N 369.629,60.25 r90 top
T_C41 "4.7uF" CAPC2012X135N 378.529,60.25 r90 top
T_C42 "100nF" CAPC1005X55N 386.629,59.65 r90 top
T_C43 "100nF" CAPC1005X55N 395.529,59.65 r90 top
T_C44 "100nF" CAPC1005X55N 272.129,59.65 r90 top
T_C45 "100nF" CAPC1005X55N 281.029,59.65 r90 top
T_C46 "100nF" CAPC1005X55N 289.829,59.65 r90 top
T_C47 "100nF" CAPC1005X55N 298.729,59.65 r90 top
T_C48 "100nF" CAPC1005X55N 307.629,59.65 r90 top
T_C49 "100nF" CAPC1005X55N 316.529,59.65 r90 top
T_C50 "100nF" CAPC1005X55N 325.429,59.65 r90 top
T_C51 "100nF" CAPC1005X55N 334.329,59.65 r90 top
T_C52 "100nF" CAPC1005X55N 342.729,59.65 r90 top
T_C53 "100nF" CAPC1005X55N 351.629,59.65 r90 top
T_C54 "4.7uF" CAPC2012X135N 360.729,60.25 r90 top
T_C55 "4.7uF" CAPC2012X135N 245.429,59.75 r90 top
T_C56 "100nF" CAPC1005X55N 254.329,59.65 r90 top
T_C57 "4.7uF" CAPC2012X135N 218.729,59.75 r90 top
T_C58 "100nF" CAPC1005X55N 227.629,59.65 r90 top
T_C59 "100nF" CAPC1005X55N 517.129,48.55 r90 top
T_C60 "100nF" CAPC1005X55N 455.329,48.55 r90 top
T_C61 "100nF" CAPC1005X55N 429.229,48.55 r90 top
T_C62 "100nF" CAPC1005X55N 384.229,48.55 r90 top
T_C63 "100nF" CAPC1005X55N 342.829,48.55 r90 top
T_C64 "100nF" CAPC1005X55N 218.729,-4.55 r90 top
T_D1 "UCLAMP3305P.TCT" SON50P160X65_HS-7N 169.1,25.2 r270 top
T_D2 "UCLAMP3305P.TCT" SON50P160X65_HS-7N 187,5.331 r0 top
T_D3 "UCLAMP3305P.TCT" SON50P160X65_HS-7N 187.012,7.602 r0 top
T_D4 "UCLAMP3305P.TCT" SON50P160X65_HS-7N 187.043,9.882 r0 top
T_D5 "SMBJ12A" DIOM5336X265N 157.15,84.732 r270 top
T_D6 "CDBU0520-HF" SOD-523F 335.329,76.85 r90 top
T_D7 "CDBU0520-HF" SOD-523F 402.229,49.65 r90 top
T_FL1 "10A/50VDC" FIL_MURATA_BNX02 178.588,80.16 r180 top
T_IC1 "TPS70933DBV" SOT95P280X145-5N 239.429,2.25 r0 top
T_IC2 "24AA02E48T-I/OT" SOT95P280X145-5N 166.1,27.6 r90 top
T_IC3 "24AA025E48-I/SN" SOIC127P600X175-8N 161.528,28.717 r90 top
T_IC4 "24AA02E48T-I/OT" SOT95P280X145-5N 169,21.2 r270 top
T_IC5 "24AA025E48-I/SN" SOIC127P600X175-8N 164.434,21.175 r270 top
T_IC6 "TMP112DQDRLRQ1" SOTFL50P160X60-6N#1 83.995,46.787 r270 top
T_IC7 "TPS3808G01DBVT" SOT95P280X145-6N 361.329,77.05 r90 top
T_IC8 "FXMA2102UMX" FXMA2102UMX 219.529,2.95 r90 top
T_IC9 "FXMA2102UMX" FXMA2102UMX 219.529,-4.05 r90 top
T_IC10 "SC18IS606PWJ" SOP65P640X110-16N 538.329,51.65 r90 top
T_IC11 "AT25SF081B-SHB" SOIC127P790X216-8N 548.329,52.35 r90 top
T_IC12 "TMUX1574DYYR" SOP50P326X110-16N 527.829,49.85 r90 top
T_IC13 "SN74LVC1G125DBV" SOT95P280X145-5N 410.829,49.75 r90 top
T_IC14 "SN74LVC1G08DBV" SOT95P280X145-5N 325.529,49.75 r90 top
T_IC15 "SN74LVC1G125DBV" SOT95P280X145-5N 420.729,49.75 r90 top
T_J1 "" 3M_N2530-6002RB 190,38.7 r270 top locked
T_J2 "" 3M_N2530-6002RB 175,38.7 r270 top locked
T_J3 "MMCX" SAMTEC_MMCX-J-P-H-ST-TH1 253.129,8.45 r0 top
T_J4 "P1" AMPHENOL_10052825-101LF 207.15,3.95 r90 top locked
T_J5 "P6" AMPHENOL_10052838-101LF 207.15,82.95 r90 top locked
T_J6 "Mini-Fit Jr.™" MOLEX_39-30-0040 200,67.809 r270 top
T_J7 "Header 10" HARWIN_M20-9980546 378.929,55.25 r90 top
T_LD1 "Red" LED_AVAGO_HSMC-C110 273.929,85.55 r90 top
T_LD2 "Green" LED_AVAGO_HSME-C110 -5.1,19.05 r90 top
T_LD3 "Green" LED_KINGBRIGHT_KPH-1608CGCK 247.829,84.65 r90 top
T_LD4 "Green" LED_KINGBRIGHT_KPH-1608CGCK 256.729,84.65 r90 top
T_LD5 "Red" LED_AVAGO_HSMC-C110 219.829,3.25 r90 top
T_M1 "PTH_3.4X6_BTKO" PTH-M3.4x6.0_BTKO 245.729,11.55 r0 top
T_M2 "PTH_3.4X6_BTKO" PTH-M3.4x6.0_BTKO 257.029,11.55 r0 top
T_M3 "PTH_3.4X6_BTKO" PTH-M3.4x6.0_BTKO 223.229,11.55 r0 top
T_M4 "PTH_3.4X6_BTKO" PTH-M3.4x6.0_BTKO 234.529,11.55 r0 top
T_OSC1 "25MHz" OSC_IQD_CFPS-39 237.929,41.85 r90 top
T_R1 "1k6" RESC1005X40N 295.929,83.65 r90 top
T_R2 "0" RESC1005X40N 184.5,13.3 r90 top
T_R3 "10k" RESC1005X40N -1.486,20.955 r0 top
T_R4 "0" RESC1005X40N 288.629,83.65 r90 top
T_R5 "1k6" RESC1005X40N -1.753,9.55 r0 top
T_R6 "1k6" RESC1005X40N 281.229,83.65 r90 top
T_R7 "10k" RESC1005X40N 265.529,83.65 r90 top
T_R8 "10k" RESC1005X40N 219.029,84.25 r90 top
T_R9 "0" RESC1005X40N 244.129,7.25 r90 top
T_R10 "0" RESC1005X40N 235.529,7.25 r90 top
T_R11 "0" RESC1005X40N 227.429,7.25 r90 top
T_R12 "0" RESC1005X40N 218.729,7.25 r90 top
T_R13 "22" RESC1005X40N 253.329,-4.55 r90 top
T_R14 "22" RESC1005X40N 244.629,-4.55 r90 top
T_R15 "22" RESC1005X40N 182,4.7 r0 top
T_R16 "22" RESC1005X40N 236.029,-4.55 r90 top
T_R17 "22" RESC1005X40N 182,6.535 r0 top
T_R18 "22" RESC1005X40N 227.429,-4.55 r90 top
T_R19 "200" RESC1005X40N 218.729,-4.55 r90 top
T_R20 "22" RESC1005X40N 181.939,11.367 r0 top
T_R21 "22" RESC1005X40N 181.941,12.287 r0 top
T_R22 "22" RESC1005X40N 182,13.35 r0 top
T_R23 "22" RESC1005X40N 182.05,14.421 r0 top
T_R24 "22" RESC1005X40N 182.1,15.35 r0 top
T_R25 "0" RESC1005X40N 84.326,42.651 r90 top
T_R26 "1M1" RESC2012X60N 226.529,66.45 r90 top
T_R27 "10M" RESC2113X55N 235.529,66.45 r90 top
T_R28 "10M" RESC2113X55N 244.429,66.45 r90 top
T_R29 "100k" RESC1005X40N 385.929,75.75 r90 top
T_R30 "3k9" RESC1005X40N 368.429,75.75 r90 top
T_R31 "10k" RESC1005X40N 248.229,75.75 r90 top
T_R32 "10k" RESC1005X40N 256.629,75.75 r90 top
T_R33 "10k" RESC1005X40N 265.529,75.75 r90 top
T_R34 "10k" RESC1005X40N 274.429,75.75 r90 top
T_R35 "0" RESC1005X40N 510.629,15.55 r90 top
T_R36 "0" RESC1005X40N 501.729,15.55 r90 top
T_R37 "0" RESC1005X40N 492.829,15.55 r90 top
T_R38 "0" RESC1005X40N 484.029,15.55 r90 top
T_R39 "0" RESC1005X40N 475.129,15.55 r90 top
T_R40 "0" RESC1005X40N 466.229,15.55 r90 top
T_R41 "0" RESC1005X40N 457.829,15.55 r90 top
T_R42 "0" RESC1005X40N 448.929,15.55 r90 top
T_R43 "0" RESC1005X40N 440.029,15.55 r90 top
T_R44 "0" RESC1005X40N 431.129,15.55 r90 top
T_R45 "0" RESC1005X40N 422.229,15.55 r90 top
T_R46 "0" RESC1005X40N 413.329,15.55 r90 top
T_R47 "0" RESC1005X40N 404.429,15.55 r90 top
T_R48 "0" RESC1005X40N 395.529,15.55 r90 top
T_R49 "0" RESC1005X40N 386.629,15.55 r90 top
T_R50 "0" RESC1005X40N 377.829,15.55 r90 top
T_R51 "0" RESC1005X40N 369.429,15.55 r90 top
T_R52 "0" RESC1005X40N 360.529,15.55 r90 top
T_R53 "0" RESC1005X40N 351.629,15.55 r90 top
T_R54 "0" RESC1005X40N 342.729,15.55 r90 top
T_R55 "0" RESC1005X40N 333.829,15.55 r90 top
T_R56 "0" RESC1005X40N 324.929,15.55 r90 top
T_R57 "0" RESC1005X40N 316.029,15.55 r90 top
T_R58 "0" RESC1005X40N 289.329,15.55 r90 top
T_R59 "0" RESC1005X40N 280.529,15.55 r90 top
T_R60 "0" RESC1005X40N 271.629,15.55 r90 top
T_R61 "0" RESC1005X40N 263.229,15.55 r90 top
T_R62 "0" RESC1005X40N 254.329,15.55 r90 top
T_R63 "0" RESC1005X40N 245.429,15.55 r90 top
T_R64 "0" RESC1005X40N 236.529,15.55 r90 top
T_R65 "0" RESC1005X40N 227.629,15.55 r90 top
T_R66 "0" RESC1005X40N 218.729,15.55 r90 top
T_R67 "10k" RESC1005X40N 236.529,1.35 r90 top
T_R68 "10k" RESC1005X40N 227.629,1.35 r90 top
T_R69 "10k" RESC1005X40N 218.729,1.35 r90 top
T_R70 "10k" RESC1005X40N 246.429,40.55 r90 top
T_R71 "10k" RESC1005X40N 255.329,40.55 r90 top
T_R72 "22" RESC1005X40N 227.629,40.55 r90 top
T_R73 "100" RESC1005X40N 263.229,59.65 r90 top
T_R74 "100" RESC1005X40N 236.529,59.65 r90 top
T_R75 "10k" RESC1005X40N 555.229,48.55 r90 top
T_R76 "10k" RESC1005X40N 564.129,48.55 r90 top
T_R77 "10k" RESC1005X40N 573.029,48.55 r90 top
T_R78 "10k" RESC1005X40N 581.829,48.55 r90 top
T_R79 "0" RESC1005X40N 508.229,48.55 r90 top
T_R80 "0" RESC1005X40N 490.429,48.55 r90 top
T_R81 "0" RESC1005X40N 482.029,48.55 r90 top
T_R82 "0" RESC1005X40N 473.129,48.55 r90 top
T_R83 "0" RESC1005X40N 464.229,48.55 r90 top
T_R84 "10k" RESC1005X40N 499.329,48.55 r90 top
T_R85 "1k" RESC1005X40N 393.129,48.55 r90 top
T_R86 "100k" RESC1005X40N 351.729,48.55 r90 top
T_R87 "10k" RESC1005X40N 360.629,48.55 r90 top
T_R88 "10k" RESC1005X40N 333.929,48.55 r90 top
T_R89 "1k3" RESC1608X55N 272.929,49.15 r90 top
T_R90 "2k2" RESC1005X40N 281.629,48.55 r90 top
T_R91 "2k2" RESC1005X40N 290.429,48.55 r90 top
T_R92 "2k2" RESC1005X40N 298.829,48.55 r90 top
T_R93 "2k2" RESC1005X40N 307.729,48.55 r90 top
T_R94 "82k" RESC1608X55N 245.629,49.15 r90 top
T_R95 "33k" RESC1005X40N 236.529,48.55 r90 top
T_R96 "1k" RESC1005X40N 227.629,48.55 r90 top
T_R97 "1k" RESC1005X40N 218.729,48.55 r90 top
T_R98 "0" RESC1005X40N 437.629,48.55 r90 top
T_R99 "10k" RESC1005X40N 446.529,48.55 r90 top
T_R100 "1k6" RESC1005X40N 227.629,1.35 r90 top
T_R101 "10k" RESC1005X40N 227.629,-4.55 r90 top
T_SW1 "Switch" SW_TYCO_1571983-4 258.629,51.15 r0 top
T_T1 "BSS138LT1G" SOT95P240X110-3N 227.529,84.55 r0 top
T_T2 "BSS138LT1G" SOT95P240X110-3N 220.229,76.65 r0 top
T_T3 "BSS138LT1G" SOT95P240X110-3N 227.529,76.65 r0 top
T_T4 "BSS138LT1G" SOT95P240X110-3N 234.929,76.65 r0 top
T_T5 "BSS138LT1G" SOT95P240X110-3N 242.329,76.65 r0 top
T_T6 "BSS138LT1G" SOT95P240X110-3N 370.929,49.45 r0 top
T_T7 "DMP2045U" SOT95P240X110-3N 318.129,49.45 r0 top
T_T8 "BC857BV" SOTFL50P160X60-6N#2 265.829,49.45 r90 top
T_TP1 "Test Point" TPS127 281.729,-4.45 r90 top
T_TP2 "Test Point" TPS127 291.629,-4.45 r90 top
T_TP3 "Test Point" TPS127 302.129,-4.45 r90 top
T_TP4 "Test Point" TPS127 271.329,-4.45 r90 top
T_TP5 "Test Point" TPS127 250.529,-4.45 r90 top
T_TP6 "Test Point" TPS127 260.929,-4.45 r90 top
T_TP7 "Test Point" TPS127 240.129,-4.45 r90 top
T_TP8 "Test Point" TPS127 229.629,-4.45 r90 top
T_TP9 "Test Point" TPS127 219.229,-4.45 r90 top
T_TR1 "1:2" XFMR_MINI-CIRCUITS_DB714 154.8,-0.8 r270 top
T_U1 "ICE40HX8K-CT256" LATC-caBGA-256 226.129,28.05 r0 top

## Footprints (in the part's own frame and the unit in brackets; to place one, negate y for a bottom-side part, rotate by r counter-clockwise, add the part's x,y. Pads: shape width x height; smd on the part's side, far side on the other; paste and mask are expansions set on the pad)
3M_N2530-6002RB [mm] "30 Contacts - Straight .100\" x .100\" Low Profile Four-Wall Header"
  round 1.6 hole 1: 1(-17.78,-1.27) 2(-17.78,1.27) 3(-15.24,-1.27) 4(-15.24,1.27) 5(-12.7,-1.27) 6(-12.7,1.27) 7(-10.16,-1.27) 8(-10.16,1.27) 9(-7.62,-1.27) 10(-7.62,1.27) 11(-5.08,-1.27) 12(-5.08,1.27) 13(-2.54,-1.27) 14(-2.54,1.27) 15(0,-1.27) 16(0,1.27) 17(2.54,-1.27) 18(2.54,1.27) 19(5.08,-1.27) 20(5.08,1.27) 21(7.62,-1.27) 22(7.62,1.27) 23(10.16,-1.27) 24(10.16,1.27) 25(12.7,-1.27) 26(12.7,1.27) 27(15.24,-1.27) 28(15.24,1.27) 29(17.78,-1.27) 30(17.78,1.27)
  silkscreen extent -22.71,-4.85 22.71,4.52, body extent -22.71,-4.11 22.71,4.52, height 9.91
AMPHENOL_10052825-101LF [mm] "72 Contacts, 2mm Pitch, 6 Columns, 4 Pairs per Column, 4 Walls, Right Angle Header"
  round 1.1 hole 0.5: A1(-5,-7.65) A2(-3,-7.75) A3(-1,-7.65) A4(1,-7.75) A5(3,-7.65) A6(5,-7.75) B1(-5,-6.25) B2(-3,-6.35) B3(-1,-6.25) B4(1,-6.35) B5(3,-6.25) B6(5,-6.35) C1(-5,-4.85) C2(-3,-4.95) C3(-1,-4.85) C4(1,-4.95) C5(3,-4.85) C6(5,-4.95) D1(-5,-3.45) D2(-3,-3.55) D3(-1,-3.45) D4(1,-3.55) D5(3,-3.45) D6(5,-3.55) E1(-5,-2.05) E2(-3,-2.15) E3(-1,-2.05) E4(1,-2.15) E5(3,-2.05) E6(5,-2.15) F1(-5,-0.65) F2(-3,-0.75) F3(-1,-0.65) F4(1,-0.75) F5(3,-0.65) F6(5,-0.75) G1(-5,0.75) G2(-3,0.65) G3(-1,0.75) G4(1,0.65) G5(3,0.75) G6(5,0.65) H1(-5,2.15) H2(-3,2.05) H3(-1,2.15) H4(1,2.05) H5(3,2.15) H6(5,2.05) I1(-5,3.55) I2(-3,3.45) I3(-1,3.55) I4(1,3.45) I5(3,3.55) I6(5,3.45) J1(-5,4.95) J2(-3,4.85) J3(-1,4.95) J4(1,4.85) J5(3,4.95) J6(5,4.85) K1(-5,6.35) K2(-3,6.25) K3(-1,6.35) K4(1,6.25) K5(3,6.35) K6(5,6.25) L1(-5,7.75) L2(-3,7.65) L3(-1,7.75) L4(1,7.65) L5(3,7.75) L6(5,7.65)
  silkscreen extent -6.95,-21.95 6.95,11.85, body extent -6.95,-21.95 6.95,11.85, height 15.25
AMPHENOL_10052838-101LF [mm] "96 Contacts, 2mm Pitch, 8 Columns, 4 Pairs per Column, 4 Walls, Right Angle Header"
  round 1.1 hole 0.5: A1(-7,-7.65) A2(-5,-7.75) A3(-3,-7.65) A4(-1,-7.75) A5(1,-7.65) A6(3,-7.75) A7(5,-7.65) A8(7,-7.75) B1(-7,-6.25) B2(-5,-6.35) B3(-3,-6.25) B4(-1,-6.35) B5(1,-6.25) B6(3,-6.35) B7(5,-6.25) B8(7,-6.35) C1(-7,-4.85) C2(-5,-4.95) C3(-3,-4.85) C4(-1,-4.95) C5(1,-4.85) C6(3,-4.95) C7(5,-4.85) C8(7,-4.95) D1(-7,-3.45) D2(-5,-3.55) D3(-3,-3.45) D4(-1,-3.55) D5(1,-3.45) D6(3,-3.55) D7(5,-3.45) D8(7,-3.55) E1(-7,-2.05) E2(-5,-2.15) E3(-3,-2.05) E4(-1,-2.15) E5(1,-2.05) E6(3,-2.15) E7(5,-2.05) E8(7,-2.15) F1(-7,-0.65) F2(-5,-0.75) F3(-3,-0.65) F4(-1,-0.75) F5(1,-0.65) F6(3,-0.75) F7(5,-0.65) F8(7,-0.75) G1(-7,0.75) G2(-5,0.65) G3(-3,0.75) G4(-1,0.65) G5(1,0.75) G6(3,0.65) G7(5,0.75) G8(7,0.65) H1(-7,2.15) H2(-5,2.05) H3(-3,2.15) H4(-1,2.05) H5(1,2.15) H6(3,2.05) H7(5,2.15) H8(7,2.05) I1(-7,3.55) I2(-5,3.45) I3(-3,3.55) I4(-1,3.45) I5(1,3.55) I6(3,3.45) I7(5,3.55) I8(7,3.45) J1(-7,4.95) J2(-5,4.85) J3(-3,4.95) J4(-1,4.85) J5(1,4.95) J6(3,4.85) J7(5,4.95) J8(7,4.85) K1(-7,6.35) K2(-5,6.25) K3(-3,6.35) K4(-1,6.25) K5(1,6.35) K6(3,6.25) K7(5,6.35) K8(7,6.25) L1(-7,7.75) L2(-5,7.65) L3(-3,7.75) L4(-1,7.65) L5(1,7.75) L6(3,7.65) L7(5,7.75) L8(7,7.65)
  silkscreen extent -8.95,-21.95 8.95,11.85, body extent -8.95,-21.95 8.95,11.85, height 15.25
c600h270 [mm] "Plated Through Hole: Hole Dia.=2.7mm Pad Dia.=6.0mm"
  round 6 hole 2.7: 1(0,0)
CAPC1005X55N [mm] "Capacitor, Non-Polarized, Chip; 1.00mm L X 0.50mm W X 0.70mm H, IPC Medium Density"
  rect 0.62x0.62 smd: 1(-0.45,0) 2(0.45,0)
  body extent -0.52,-0.27 0.53,0.28, height 0.55
CAPC2012X95N [mm] "Chip Capacitor, Body 2.0x1.25mm, IPC Medium Density"
  rect 1.1x1.45 smd: 1(-0.9,0) 2(0.9,0)
  silkscreen extent 0,-0.58 0,0.58, body extent -1.05,-0.67 1.05,0.68, height 0.95
CAPC2012X135N [mm] "Chip Capacitor, Body 2.0x1.25mm, IPC Medium Density"
  rect 1.05x1.4 smd: 1(-0.9,0) 2(0.9,0)
  silkscreen extent 0,-0.58 0,0.58, body extent -1.05,-0.67 1.05,0.68, height 1.25
DIOM5336X265N [mm] "DO-214-AA/SMB Diode, Molded Body; 5.34mm L X 3.625mm W X 2.65mm H, IPC Medium Density"
  rect 2.3x2.15 smd: 1(-2.15,0) 2(2.15,0)
  silkscreen extent -3.92,-1.8 2.65,1.8, body extent -2.7,-1.95 2.7,1.95, height 2.4
FIDUCIAL_TOP_C100-200#1 [mm] "Round Fiducial Target, Top Layer, 1.0mm, Top Solder 2.0mm, Keepout =2.0mm"
  round 1 smd paste-0.51 mask+0.5: FTG2(0,0)
  L1 keep-out circle w0.1: c0,0 r1
FIDUCIAL_TOP_C100-200#2 [mm] "Round Fiducial Target, Top Layer, 1.0mm, Top Solder 2.0mm, Keepout =2.0mm"
  round 1 smd paste-0.51 mask+0.5: 1(0,0)
  L1 keep-out circle w0.1: c0,0 r1
FIDUCIAL_TOP_S100-200 [mm] "Square Fiducial Target, Top Layer, 1.0mm, Top Solder 2.0mm, Keepout =2.0mm"
  rect 1x1 smd rot 45 paste-0.51 mask+0.5: 1(0,0)
  L1 keep-out region: 1.414,0 0,-1.414 -1.414,0 0,1.414
FIL_MURATA_BNX02 [mm] "Block Type EMIFIL LC Combined Type, BNX02* Series"
  rect 3.8x2.5 smd: 1(-6.85,2.1) 2(6.85,2.1) 3(-6.85,-2.2) 4(6.85,-2.2)
  rect 7.9x2.3 smd: 4(1,-5.1)
  rect 3.4x2.3 smd: 4(3.25,5.1)
  silkscreen extent -5.95,-4.45 7.77,5.05, body extent -6.05,-4.55 6.05,4.55, height 3.1
FXMA2102UMX [mm]
  rect 0.55x0.25 smd: 1(-0.53,0)
  rect 0.25x0.45 smd: 2(-0.4,-0.475) 3(0,-0.475) 4(0.4,-0.475) 6(0.4,0.475) 7(0,0.475) 8(-0.4,0.475)
  rect 0.45x0.25 smd: 5(0.58,0)
  silkscreen extent -1.1,-0.05 -1,0.05, body extent -0.71,-0.61 0.71,0.61, height 0.5
HARWIN_M20-9980546 [mm] "10 Contacts - Pitch 2.54mm - Dual Row Straight Header (Lead Length 6.1mm, Insulator 2.54mm)"
  round 1.7 hole 1: 1(-5.08,-1.27) 2(-5.08,1.27) 3(-2.54,-1.27) 4(-2.54,1.27) 5(0,-1.27) 6(0,1.27) 7(2.54,-1.27) 8(2.54,1.27) 9(5.08,-1.27) 10(5.08,1.27)
  silkscreen extent -6.35,-3.27 6.35,2.54, body extent -6.35,-2.54 6.35,2.54, height 8.64
LATC-caBGA-256 [mm] "BGA, 256-Balls, Body 14x14mm, Pitch 0.8mm"
  round 0.4 smd: A1(-6,6) A2(-5.2,6) A3(-4.4,6) A4(-3.6,6) A5(-2.8,6) A6(-2,6) A7(-1.2,6) A8(-0.4,6) A9(0.4,6) A10(1.2,6) A11(2,6) A12(2.8,6) A13(3.6,6) A14(4.4,6) A15(5.2,6) A16(6,6) B1(-6,5.2) B2(-5.2,5.2) B3(-4.4,5.2) B4(-3.6,5.2) B5(-2.8,5.2) B6(-2,5.2) B7(-1.2,5.2) B8(-0.4,5.2) B9(0.4,5.2) B10(1.2,5.2) B11(2,5.2) B12(2.8,5.2) B13(3.6,5.2) B14(4.4,5.2) B15(5.2,5.2) B16(6,5.2) C1(-6,4.4) C2(-5.2,4.4) C3(-4.4,4.4) C4(-3.6,4.4) C5(-2.8,4.4) C6(-2,4.4) C7(-1.2,4.4) C8(-0.4,4.4) C9(0.4,4.4) C10(1.2,4.4) C11(2,4.4) C12(2.8,4.4) C13(3.6,4.4) C14(4.4,4.4) C15(5.2,4.4) C16(6,4.4) D1(-6,3.6) D2(-5.2,3.6) D3(-4.4,3.6) D4(-3.6,3.6) D5(-2.8,3.6) D6(-2,3.6) D7(-1.2,3.6) D8(-0.4,3.6) D9(0.4,3.6) D10(1.2,3.6) D11(2,3.6) D12(2.8,3.6) D13(3.6,3.6) D14(4.4,3.6) D15(5.2,3.6) D16(6,3.6) E1(-6,2.8) E2(-5.2,2.8) E3(-4.4,2.8) E4(-3.6,2.8) E5(-2.8,2.8) E6(-2,2.8) E7(-1.2,2.8) E8(-0.4,2.8) E9(0.4,2.8) E10(1.2,2.8) E11(2,2.8) E12(2.8,2.8) E13(3.6,2.8) E14(4.4,2.8) E15(5.2,2.8) E16(6,2.8) F1(-6,2) F2(-5.2,2) F3(-4.4,2) F4(-3.6,2) F5(-2.8,2) F6(-2,2) F7(-1.2,2) F8(-0.4,2) F9(0.4,2) F10(1.2,2) F11(2,2) F12(2.8,2) F13(3.6,2) F14(4.4,2) F15(5.2,2) F16(6,2) G1(-6,1.2) G2(-5.2,1.2) G3(-4.4,1.2) G4(-3.6,1.2) G5(-2.8,1.2) G6(-2,1.2) G7(-1.2,1.2) G8(-0.4,1.2) G9(0.4,1.2) G10(1.2,1.2) G11(2,1.2) G12(2.8,1.2) G13(3.6,1.2) G14(4.4,1.2) G15(5.2,1.2) G16(6,1.2) H1(-6,0.4) H2(-5.2,0.4) H3(-4.4,0.4) H4(-3.6,0.4) H5(-2.8,0.4) H6(-2,0.4) H7(-1.2,0.4) H8(-0.4,0.4) H9(0.4,0.4) H10(1.2,0.4) H11(2,0.4) H12(2.8,0.4) H13(3.6,0.4) H14(4.4,0.4) H15(5.2,0.4) H16(6,0.4) J1(-6,-0.4) J2(-5.2,-0.4) J3(-4.4,-0.4) J4(-3.6,-0.4) J5(-2.8,-0.4) J6(-2,-0.4) J7(-1.2,-0.4) J8(-0.4,-0.4) J9(0.4,-0.4) J10(1.2,-0.4) J11(2,-0.4) J12(2.8,-0.4) J13(3.6,-0.4) J14(4.4,-0.4) J15(5.2,-0.4) J16(6,-0.4) K1(-6,-1.2) K2(-5.2,-1.2) K3(-4.4,-1.2) K4(-3.6,-1.2) K5(-2.8,-1.2) K6(-2,-1.2) K7(-1.2,-1.2) K8(-0.4,-1.2) K9(0.4,-1.2) K10(1.2,-1.2) K11(2,-1.2) K12(2.8,-1.2) K13(3.6,-1.2) K14(4.4,-1.2) K15(5.2,-1.2) K16(6,-1.2) L1(-6,-2) L2(-5.2,-2) L3(-4.4,-2) L4(-3.6,-2) L5(-2.8,-2) L6(-2,-2) L7(-1.2,-2) L8(-0.4,-2) L9(0.4,-2) L10(1.2,-2) L11(2,-2) L12(2.8,-2) L13(3.6,-2) L14(4.4,-2) L15(5.2,-2) L16(6,-2) M1(-6,-2.8) M2(-5.2,-2.8) M3(-4.4,-2.8) M4(-3.6,-2.8) M5(-2.8,-2.8) M6(-2,-2.8) M7(-1.2,-2.8) M8(-0.4,-2.8) M9(0.4,-2.8) M10(1.2,-2.8) M11(2,-2.8) M12(2.8,-2.8) M13(3.6,-2.8) M14(4.4,-2.8) M15(5.2,-2.8) M16(6,-2.8) N1(-6,-3.6) N2(-5.2,-3.6) N3(-4.4,-3.6) N4(-3.6,-3.6) N5(-2.8,-3.6) N6(-2,-3.6) N7(-1.2,-3.6) N8(-0.4,-3.6) N9(0.4,-3.6) N10(1.2,-3.6) N11(2,-3.6) N12(2.8,-3.6) N13(3.6,-3.6) N14(4.4,-3.6) N15(5.2,-3.6) N16(6,-3.6) P1(-6,-4.4) P2(-5.2,-4.4) P3(-4.4,-4.4) P4(-3.6,-4.4) P5(-2.8,-4.4) P6(-2,-4.4) P7(-1.2,-4.4) P8(-0.4,-4.4) P9(0.4,-4.4) P10(1.2,-4.4) P11(2,-4.4) P12(2.8,-4.4) P13(3.6,-4.4) P14(4.4,-4.4) P15(5.2,-4.4) P16(6,-4.4) R1(-6,-5.2) R2(-5.2,-5.2) R3(-4.4,-5.2) R4(-3.6,-5.2) R5(-2.8,-5.2) R6(-2,-5.2) R7(-1.2,-5.2) R8(-0.4,-5.2) R9(0.4,-5.2) R10(1.2,-5.2) R11(2,-5.2) R12(2.8,-5.2) R13(3.6,-5.2) R14(4.4,-5.2) R15(5.2,-5.2) R16(6,-5.2) T1(-6,-6) T2(-5.2,-6) T3(-4.4,-6) T4(-3.6,-6) T5(-2.8,-6) T6(-2,-6) T7(-1.2,-6) T8(-0.4,-6) T9(0.4,-6) T10(1.2,-6) T11(2,-6) T12(2.8,-6) T13(3.6,-6) T14(4.4,-6) T15(5.2,-6) T16(6,-6)
  silkscreen extent -7.77,-7 7,7, body extent -7,-7 7,7, height 1.7
LED_AVAGO_HSMC-C110 [mm] "Red Chip LED, 2-Leads, Body 3.3x1.6mm, Side Emitting Package"
  rect 1.5x1 smd: 1(-1.75,0) 2(1.75,0)
  rect 0.9x0.9 smd: 3(0,-0.65)
  silkscreen extent -1.87,-1.28 0.86,1.3, body extent -1.65,-0.3 1.65,1.3, height 1
LED_AVAGO_HSME-C110 [mm] "Green Chip LED, 2-Leads, Body 3.3x1.6mm, Side Emitting Package"
  rect 1.5x1 smd: 1(-1.75,0) 2(1.75,0)
  rect 0.9x0.9 smd: 3(0,-0.65)
  silkscreen extent -1.87,-1.28 0.86,1.3, body extent -1.65,-0.3 1.65,1.3, height 1
LED_KINGBRIGHT_KPH-1608CGCK [mm] "SMT Green LED, Case 0603, Body L 1.6 x W 0.8mm H 0.65mm"
  rect 0.8x0.8 smd: 1(-0.825,0) 2(0.825,0)
  silkscreen extent -1.82,-0.4 0.08,0.4, body extent -0.8,-0.4 0.8,0.4, height 0.65
MOLEX_39-30-0040 [mm] "4.20mm (.165\") Pitch Mini-Fit Jr. Header, Dual Row, Right Angle with Snap-in Plastic Peg PCB Lock, 4 Circuits"
  round 2.5 hole 1.8: 1(-2.1,2.75) 2(2.1,2.75) 3(-2.1,-2.75) 4(2.1,-2.75)
  round 1 hole 3 unplated mask+1: 5(0,10.05)
  silkscreen extent -5.2,-1.24 4.8,16.65, body extent -5.2,-3.28 4.8,16.65, height 11.4
OSC_IQD_CFPS-39 [mm] "Oscillator, Side Concave, 2.20mm Pitch, 4 Pins, 2.70mm L X 3.40mm W X 1.20mm H, CFPS-39 Series"
  rect 1.3x1.3 smd: 1(-0.85,1.05) 2(-0.85,-1.05) 3(0.85,-1.05) 4(0.85,1.05)
  silkscreen extent -2.05,-0.2 1.35,1.22, body extent -1.35,-1.7 1.35,1.7, height 1.3
PTH-M3.4x6.0_BTKO [mm]
  round 6 hole 3.4: 1(0,0)
  L4 keep-out region: -5,-3.05 -5,7.3 5,7.3 5,-3.05 1.173,-3.05 1.173,-3.056 2.504,-2.108 3.211,-0.635 3.118,0.997 2.247,2.38 0.817,3.169 -0.817,3.169 -2.247,2.38 -3.118,0.997 -3.211,-0.635 -2.504,-2.108 -1.173,-3.056 -1.173,-3.056 -1.173,-3.05
RESC1005X40N [mm] "Chip Resistor, EIA 0402, Metric 1005, Body 1.0x0.5mm, IPC Medium Density"
  rect 0.58x0.62 smd: 1(-0.47,0) 2(0.47,0)
  body extent -0.52,-0.27 0.53,0.28, height 0.4
RESC1608X55N [mm] "Chip Resistor, EIA 0603, Metric 1608, Body 1.6x0.8mm, IPC Medium Density"
  rect 0.9x1 smd: 1(-0.8,0) 2(0.8,0)
  body extent -0.87,-0.47 0.88,0.48, height 0.55
RESC2012X60N [mm] "Chip Resistor, EIA 0805, Metric 2012, Body 2.0x1.2mm, IPC Medium Density"
  rect 0.95x1.4 smd: 1(-1,0) 2(1,0)
  silkscreen extent 0,-0.55 0,0.55, body extent -1.1,-0.67 1.1,0.68, height 0.6
RESC2113X55N [mm] "Chip Resistor, EIA 0805, Metric 2113, Body 2.05x1.3mm, IPC Medium Density"
  rect 1x1.45 smd: 1(-0.95,0) 2(0.95,0)
  silkscreen extent 0,-0.55 0,0.55, body extent -1,-0.62 1,0.63, height 0.55
SAMTEC_MMCX-J-P-H-ST-TH1 [mm] "Straight Through-hole 50 Ohm Micro Mini RF Jack, MMCX Serie"
  round 1.55 hole 0.85: 1(0,0) 2(-1.27,-1.27) 2(-1.27,1.27) 2(1.27,-1.27) 2(1.27,1.27)
  silkscreen extent -1.75,-1.75 1.75,1.75, body extent -1.75,-1.75 1.75,1.75, height 4.35
SOD-523F [mm] "Small Outline Diode Flat Lead (SOD-523F), Body; 1.80mm L X 1mm W X 0.85mm H"
  rect 0.6x0.8 smd: 1(-0.85,0) 2(0.85,0)
  silkscreen extent -1.87,-0.5 0.2,0.52, body extent -0.91,-0.5 0.89,0.5, height 0.85
SOIC127P600X175-8N [mm] "SOIC 8, Pitch 1.27mm - Body 4x5mm, IPC Medium Density"
  rect 1.55x0.6 smd: 1(-2.7,1.905) 2(-2.7,0.635) 3(-2.7,-0.635) 4(-2.7,-1.905) 5(2.7,-1.905) 6(2.7,-0.635) 7(2.7,0.635) 8(2.7,1.905)
  silkscreen extent -2.52,-2.5 1.55,2.88, body extent -3.1,-2.5 3.1,2.5, height 1.75
SOIC127P790X216-8N [mm] "SOIC, 1.27mm, Pitch; 8 Pin, 5.285mm W X 5.335mm L X 2.16mm H body, IPC Medium Density"
  rect 1.6x0.6 smd: 1(-3.6,1.905) 2(-3.6,0.635) 3(-3.6,-0.635) 4(-3.6,-1.905) 5(3.6,-1.905) 6(3.6,-0.635) 7(3.6,0.635) 8(3.6,1.905)
  silkscreen extent -4.27,-2.65 2.47,2.87, body extent -3.86,-2.54 3.86,2.54, height 2
SON50P160X65_HS-7N [mm] "SON, 6-Leads, Body 1,60x1,60mm, Pitch 0,50mm, Thermal Pad 1,18x0,28mm, IPC Medium Density"
  rect 0.63x0.3 smd: 1(-0.76,0.5) 2(-0.76,0) 3(-0.76,-0.5) 4(0.76,-0.5) 5(0.76,0) 6(0.76,0.5)
  rect 0.45x1.3 smd: 7(0,0)
  silkscreen extent -1.27,-0.98 0.85,1.02, body extent -0.85,-0.85 0.85,0.85, height 0.65
SOP50P326X110-16N [mm]
  rect 1.075x0.3 smd: 1(-1.538,1.75) 2(-1.538,1.25) 3(-1.538,0.75) 4(-1.538,0.25) 5(-1.538,-0.25) 6(-1.538,-0.75) 7(-1.538,-1.25) 8(-1.538,-1.75) 9(1.538,-1.75) 10(1.538,-1.25) 11(1.538,-0.75) 12(1.538,-0.25) 13(1.538,0.25) 14(1.538,0.75) 15(1.538,1.25) 16(1.538,1.75)
  silkscreen extent -2.07,-2.1 0.65,2.25, body extent -1.63,-2.1 1.63,2.1, height 1.02
SOP65P640X110-16N [mm]
  rect 1.475x0.45 smd: 1(-2.938,2.275) 2(-2.938,1.625) 3(-2.938,0.975) 4(-2.938,0.325) 5(-2.938,-0.325) 6(-2.938,-0.975) 7(-2.938,-1.625) 8(-2.938,-2.275) 9(2.938,-2.275) 10(2.938,-1.625) 11(2.938,-0.975) 12(2.938,-0.325) 13(2.938,0.325) 14(2.938,0.975) 15(2.938,1.625) 16(2.938,2.275)
  silkscreen extent -3.67,-2.5 1.85,2.85, body extent -3.2,-2.5 3.2,2.5, height 1.1
SOT95P240X110-3N [mm] "SOT23 3-Leads, Pitch 0.95mm, Body 1.3x2.9mm, IPC Medium Density"
  rect 1.05x0.65 smd: 1(-1.15,0.95) 2(-1.15,-0.95) 3(1.15,0)
  silkscreen extent -1.52,-1.45 0.3,1.92, body extent -1.25,-1.5 1.25,1.5, height 1.1
SOT95P280X145-5N [mm] "SOT, 0.95mm pitch; 5 pin, 1.60mm W X 2.90mm L X 1.45mm H body, IPC Medium Density"
  rect 1.1x0.6 smd: 1(-1.3,0.95) 2(-1.3,0) 3(-1.3,-0.95) 4(1.3,-0.95) 5(1.3,0.95)
  silkscreen extent -1.72,-1.45 0.43,1.87, body extent -1.4,-1.5 1.4,1.5, height 1.45
SOT95P280X145-6N [mm] "SOT23, 6-Leads, Body 1.6x3.0mm, Pitch 0.95mm, IPC Medium Density"
  rect 1.05x0.6 smd: 1(-1.35,0.95) 2(-1.35,0) 3(-1.35,-0.95) 4(1.35,-0.95) 5(1.35,0) 6(1.35,0.95)
  silkscreen extent -1.77,-1.55 0.45,1.92, body extent -1.4,-1.5 1.4,1.5, height 1.45
SOTFL50P160X60-6N#1 [mm]
  rect 0.475x0.3 smd: 1(-0.838,0.5) 2(-0.838,0) 3(-0.838,-0.5) 4(0.838,-0.5) 5(0.838,0) 6(0.838,0.5)
  silkscreen extent -1.07,-0.8 0.25,0.9, body extent -0.8,-0.8 0.8,0.8, height 0.6
SOTFL50P160X60-6N#2 [mm] "SOTFL (SOT666), 0.50mm Pitch; 6 Pin, 1.20mm W X 1.60mm L X 0.60mm H body, IPC Medium Density"
  rect 0.57x0.3 smd: 1(-0.79,0.5) 2(-0.79,0) 3(-0.79,-0.5) 4(0.79,-0.5) 5(0.79,0) 6(0.79,0.5)
  silkscreen extent -1.7,-0.8 0,0.8, body extent -0.85,-0.85 0.85,0.85, height 0.6
SW_TYCO_1571983-4 [mm] "Pitch 1.27mm,  Body 6.2x6.2mm, 4 Ways SPST Surface-Mount DIP Switch, TYCO GDH Serie"
  rect 1.55x0.55 smd: 1(-3.8,1.905) 2(-3.8,0.635) 3(-3.8,-0.635) 4(-3.8,-1.905) 5(3.8,-1.905) 6(3.8,-0.635) 7(3.8,0.635) 8(3.8,1.905)
  silkscreen extent -4.42,-3.1 2.7,3.1, body extent -4.06,-3.1 4.06,3.1, height 2.36
TPS127 [mm] "1.27 x  1.27mm SMD Test Point Area"
  rect 1.27x1.27 smd paste-1.27: 1(0,0)
  silkscreen extent -0.94,-0.94 0.94,0.94
XFMR_MINI-CIRCUITS_DB714 [mm] "MINI-CIRCUITS RF Transformer, Case DB715 - Body 4.06X3.81mm"
  rect 0.76x1.65 smd: 1(-1.27,1.59) 2(0,1.59) 3(1.27,1.59) 4(1.27,-1.59) 5(0,-1.59) 6(-1.27,-1.59)
  silkscreen extent -2.3,-0.37 1.63,1.73, body extent -1.63,-2.03 1.63,2.03, height 3.76